# EAGLE board semafor-a-r2-panel (EAGLE 9.4.2)
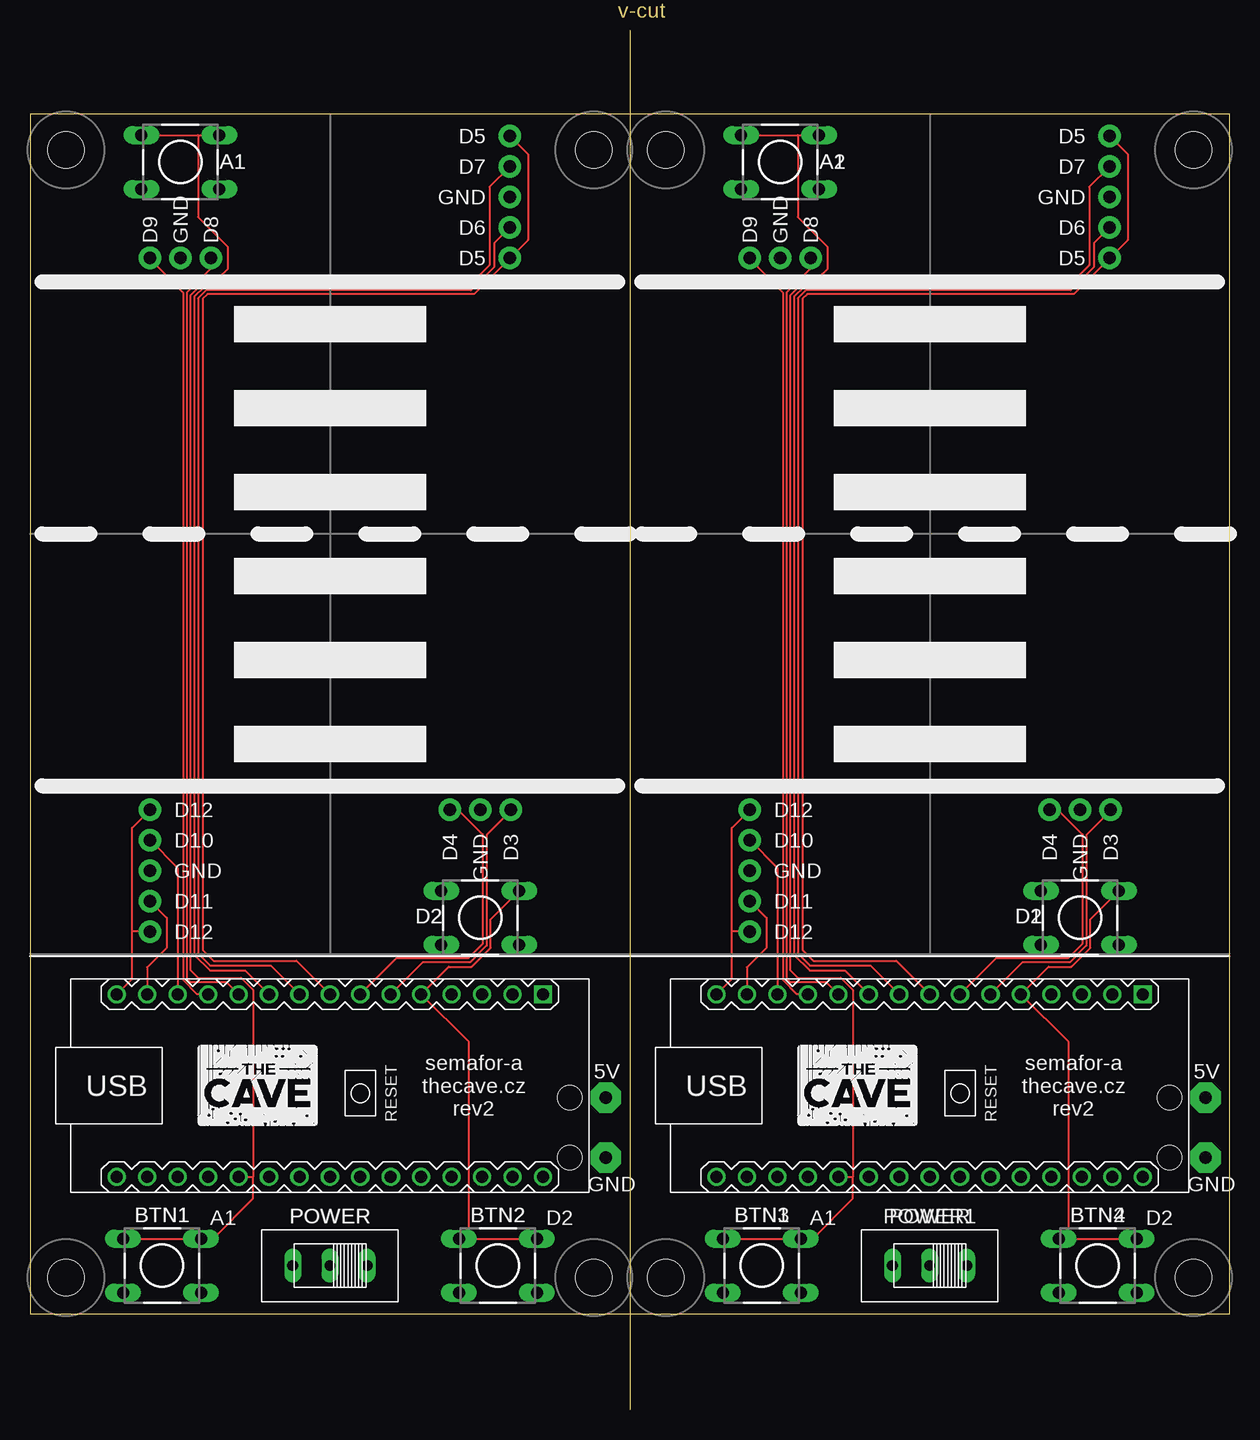
[diagram p0: board, top side]
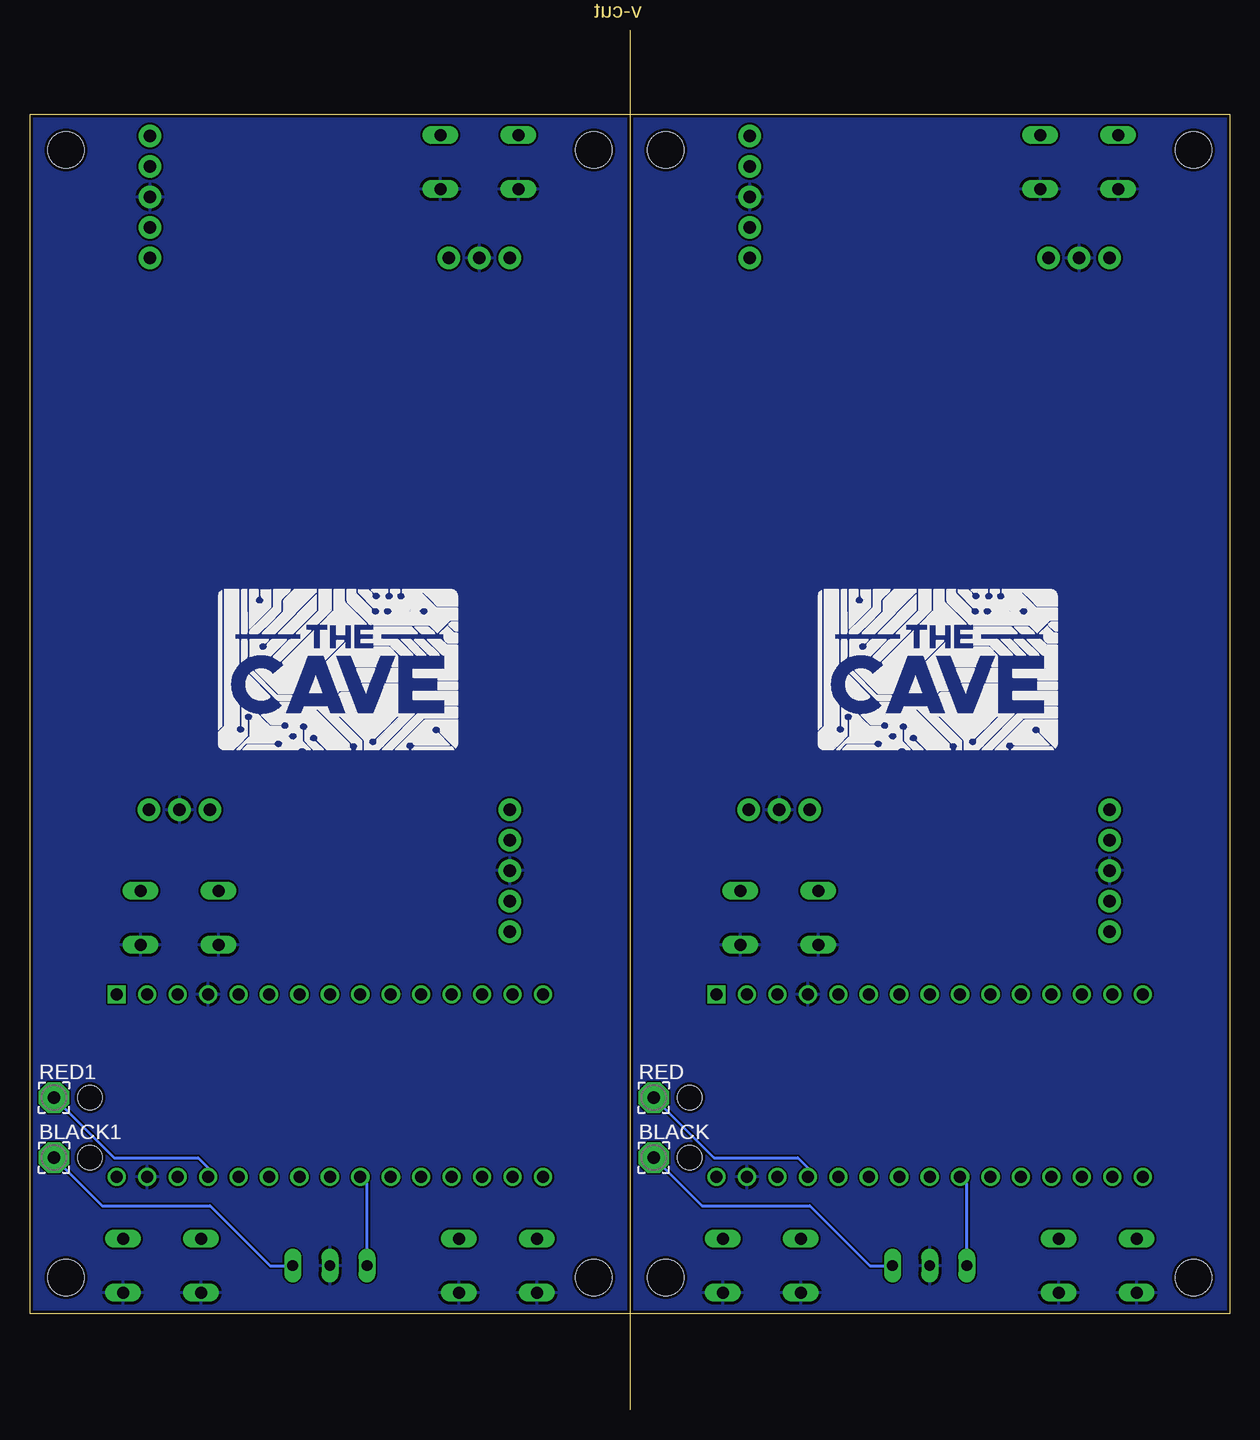
[diagram p1: board, bottom side, seen from below]

Size 100 x 115 mm. Coordinates in mm from the lower left corner, seen from the top.
Outline: 50,115 50,0
Outline: 0,108 0,8 100,8 100,108 0,108
Copper layers (1*16): Top 0.035mm / dielectric 1.5mm / Bottom 0.035mm
Design rules "SeeedStudio_2layer_DRU_no_angle_20140221": minimum track width 6mil, minimum drill 12mil, track to track 6mil, track to pad 6mil, pad to pad 6mil, via to via 6mil, smd to smd 0mil, copper to edge 10mil, drill to drill 10mil, minimum pad ring 10mil, minimum via ring 6mil, stop-mask expansion 2mil, vias tented up to drill 100mil, thermal gap 10mil
Holes 3 mm at 3,11 47,11 47,105 3,105 53,11 97,11 97,105 53,105
Holes 2 mm at 45,26 45,21 95,26 95,21

## Footprints (pad centres in the part's own frame; a part is rotated, then mirrored left to right if it is on the bottom)
DTS-6 = drill 1 long: 1 -3.25,2.25; 2 3.25,2.25; 3 -3.25,-2.25; 4 3.25,-2.25
2,54/1,0 = drill 1.016 pad 2.54 octagon: 1 0,0
1X03_NO_SILK = drill 1.016 pad 1.88: 1 0,0; 2 2.54,0; 3 5.08,0
1X05_NO_SILK = drill 1.016 pad 1.88: 1 0,0; 2 2.54,0; 3 5.08,0; 4 7.62,0; 5 10.16,0
ARDUINO-NANO-3.0 = drill 1 square: J1.1 17.78,7.62 | drill 1: J1.2 15.24,7.62; J1.3 12.7,7.62; J1.4 10.16,7.62; J1.5 7.62,7.62; J1.6 5.08,7.62; J1.7 2.54,7.62; J1.8 0,7.62; J1.9 -2.54,7.62; J1.10 -5.08,7.62; J1.11 -7.62,7.62; J1.12 -10.16,7.62; J1.13 -12.7,7.62; J1.14 -15.24,7.62; J1.15 -17.78,7.62; J2.1 17.78,-7.62; J2.2 15.24,-7.62; J2.3 12.7,-7.62; J2.4 10.16,-7.62; J2.5 7.62,-7.62; J2.6 5.08,-7.62; J2.7 2.54,-7.62; J2.8 0,-7.62; J2.9 -2.54,-7.62; J2.10 -5.08,-7.62; J2.11 -7.62,-7.62; J2.12 -10.16,-7.62; J2.13 -12.7,-7.62; J2.14 -15.24,-7.62; J2.15 -17.78,-7.62
B143 = drill 0.9 long: S1 -3.1,0; S2 0,0; S3 3.1,0

## Placement (x,y rotation side)
A1  DTS-6  [DTS-6]  12.54,104 0 top
A2  DTS-6  [DTS-6]  62.54,104 0 top
BLACK  [2,54/1,0]  48,21 0 bottom
BLACK1  [2,54/1,0]  98,21 0 bottom
BTN1  DTS-6  [DTS-6]  11,12 0 top
BTN2  DTS-6  [DTS-6]  39,12 0 top
BTN3  DTS-6  [DTS-6]  61,12 0 top
BTN4  DTS-6  [DTS-6]  89,12 0 top
D1  DTS-6  [DTS-6]  87.54,41 0 top
D2  DTS-6  [DTS-6]  37.54,41 0 top
J1  [1X03_NO_SILK]  10,96 0 top
J2  [1X03_NO_SILK]  35,50 0 top
J3  [1X05_NO_SILK]  40,96 90 top
J4  [1X05_NO_SILK]  10,50 270 top
J5  [1X03_NO_SILK]  60,96 0 top
J6  [1X03_NO_SILK]  85,50 0 top
J7  [1X05_NO_SILK]  90,96 90 top
J8  [1X05_NO_SILK]  60,50 270 top
M1  ARDUINO-NANO-3.0#NOHOLE  [ARDUINO-NANO-3.0]  25,27 0 top
M2  ARDUINO-NANO-3.0#NOHOLE  [ARDUINO-NANO-3.0]  75,27 0 top
POWER  B143  [B143]  25,12 180 top
POWER1  B143  [B143]  75,12 180 top
RED  [2,54/1,0]  48,26 0 bottom
RED1  [2,54/1,0]  98,26 0 bottom
U$1  THECAVE_LOGO_NEW_TOP_SMALL  [NEW_LOGO_SMALL_TOP]  13.98,23.67 0 top
U$2  THECAVE_LOGO_NEW_BOTTOM  [NEW_LOGO_BOTTOM]  14,55 0 top
U$3  THECAVE_LOGO_NEW_TOP_SMALL  [NEW_LOGO_SMALL_TOP]  63.98,23.67 0 top
U$4  THECAVE_LOGO_NEW_BOTTOM  [NEW_LOGO_BOTTOM]  64,55 0 top

## Library data of the parts
A1 A2 BTN1-BTN4 D1 D2 = switch-tact
BLACK BLACK1 RED RED1 = wirepad
J1-J8 = SparkFun-Connectors
M1 M2 POWER POWER1 U$1-U$4 = thecave

## Nets
3V1: M2.J2.14
3V3: M1.J2.14
BTN1: A1.1 A1.2 BTN1.1 BTN1.2 M1.J2.11
BTN2: BTN2.1 BTN2.2 D2.2 M1.J1.5
BTN3: A2.1 A2.2 BTN3.1 BTN3.2 M2.J2.11
BTN4: BTN4.1 BTN4.2 D1.2 M2.J1.5
GND: A1.3 A1.4 BTN1.3 BTN1.4 BTN2.3 BTN2.4 D2.3 D2.4 J1.2 J2.2 J3.3 J4.3 M1.J1.4 M1.J2.2 POWER.S2
GND1: A2.3 A2.4 BTN3.3 BTN3.4 BTN4.3 BTN4.4 D1.3 D1.4 J5.2 J6.2 J7.3 J8.3 M2.J1.4 M2.J2.2 POWER1.S2
N$1: M1.J2.9 POWER.S3
N$2: BLACK.1 POWER.S1
N$3: M2.J2.9 POWER1.S3
N$4: BLACK1.1 POWER1.S1
P1-G: J3.4 M1.J1.10
P1-G1: J7.4 M2.J1.10
P1-R: J3.2 M1.J1.9
P1-R1: J7.2 M2.J1.9
P1-Y: J3.1 J3.5 M1.J1.8
P1-Y1: J7.1 J7.5 M2.J1.8
P2-G: J4.4 M1.J1.14
P2-G1: J8.4 M2.J1.14
P2-R: J4.2 M1.J1.13
P2-R1: J8.2 M2.J1.13
P2-Y: J4.1 J4.5 M1.J1.15
P2-Y1: J8.1 J8.5 M2.J1.15
P3-G: J2.3 M1.J1.6
P3-G1: J6.3 M2.J1.6
P3-R: J2.1 M1.J1.7
P3-R1: J6.1 M2.J1.7
P4-G: J1.3 M1.J1.11
P4-G1: J5.3 M2.J1.11
P4-R: J1.1 M1.J1.12
P4-R1: J5.1 M2.J1.12
VCC: M1.J2.4 RED.1
VCC1: M2.J2.4 RED1.1
VIN: M1.J2.1
VIN1: M2.J2.1

## Tracks (layer width: path | path; a pad name or v marks a point on that pad's centre or on a via)
BTN1
  Top 0.152: BTN1.1 BTN1.2 15.25,14.25 18.6,17.6 18.6,19.38 | A1.1 14,106.25 | 14,106.25 A1.2 | 18.6,19.38 18.6,35 17.6,36 14,36 13.38,36.61 13.38,92.89 14.8,94.3 15.7,94.3 16.5,95.1 16.5,96.9 14,99.4 14,106.25 | M1.J2.11 18.6,19.38
BTN2
  Top 0.152: BTN2.2 BTN2.1 36.6,15.1 36.6,30.64 M1.J1.5 34.9,36.9 36.8,36.9 38.4,38.5 38.4,40.86 D2.2
BTN3
  Top 0.152: BTN3.1 BTN3.2 65.25,14.25 68.6,17.6 68.6,19.38 | A2.1 64,106.25 | 64,106.25 A2.2 | 68.6,19.38 68.6,35 67.6,36 64,36 63.38,36.61 63.38,92.89 64.8,94.3 65.7,94.3 66.5,95.1 66.5,96.9 64,99.4 64,106.25 | M2.J2.11 68.6,19.38
BTN4
  Top 0.152: BTN4.2 BTN4.1 86.6,15.1 86.6,30.64 M2.J1.5 84.9,36.9 86.8,36.9 88.4,38.5 88.4,40.86 D1.2
GND
  pour Bottom: 0,108 50,108 50,8 0,8
GND1
  pour Bottom: 50,108 100,108 100,8 50,8
N$1
  Bottom 0.254: POWER.S3 21.9,18.82 M1.J2.9
N$2
  Bottom 0.254: BLACK.1 44,17 35,17 30,12 POWER.S1
N$3
  Bottom 0.254: POWER1.S3 71.9,18.82 M2.J2.9
N$4
  Bottom 0.254: BLACK1.1 94,17 85,17 80,12 POWER1.S1
P1-G
  Top 0.152: J3.4 38.3,101.92 38.3,95.4 36.51,93.61 14.55,93.61 13.7,92.76 13.7,37.91 15,36.6 17.94,36.6 M1.J1.10
P1-G1
  Top 0.152: J7.4 88.3,101.92 88.3,95.4 86.51,93.61 64.55,93.61 63.7,92.76 63.7,37.91 65,36.6 67.94,36.6 M2.J1.10
P1-R
  Top 0.152: J3.2 38.7,97.24 38.7,95.24 36.77,93.31 14.67,93.31 14,92.63 14,38.03 15.02,37.02 20.06,37.02 M1.J1.9
P1-R1
  Top 0.152: J7.2 88.7,97.24 88.7,95.24 86.77,93.31 64.67,93.31 64,92.63 64,38.03 65.02,37.02 70.06,37.02 M2.J1.9
P1-Y
  Top 0.152: J3.5 41.5,104.66 41.5,97.5 J3.1 37,93 14.8,93 14.4,92.6 14.4,38.3 15.3,37.4 22.22,37.4 M1.J1.8
P1-Y1
  Top 0.152: J7.5 91.5,104.66 91.5,97.5 J7.1 87,93 64.8,93 64.4,92.6 64.4,38.3 65.3,37.4 72.22,37.4 M2.J1.8
P2-G
  Top 0.152: J4.4 11.4,40.98 11.4,38.5 9.76,36.86 M1.J1.14
P2-G1
  Top 0.152: J8.4 61.4,40.98 61.4,38.5 59.76,36.86 M2.J1.14
P2-R
  Top 0.152: J4.2 12.3,45.16 M1.J1.13
P2-R1
  Top 0.152: J8.2 62.3,45.16 M2.J1.13
P2-Y
  Top 0.152: M1.J1.15 8.5,35.9 8.5,39.8 | 8.5,39.8 8.5,48.5 J4.1 | J4.5 8.54,39.84 8.5,39.8
P2-Y1
  Top 0.152: M2.J1.15 58.5,35.9 58.5,39.8 | 58.5,39.8 58.5,48.5 J8.1 | J8.5 58.54,39.84 58.5,39.8
P3-G
  Top 0.152: J2.3 40.08,49.9 38.08,47.9 38.08,38.68 36.68,37.28 32.74,37.28 M1.J1.6
P3-G1
  Top 0.152: J6.3 90.08,49.9 88.08,47.9 88.08,38.68 86.68,37.28 82.74,37.28 M2.J1.6
P3-R
  Top 0.152: J2.1 35.68,50 37.74,47.94 37.74,38.82 36.54,37.62 30.54,37.62 M1.J1.7
P3-R1
  Top 0.152: J6.1 85.68,50 87.74,47.94 87.74,38.82 86.54,37.62 80.54,37.62 M2.J1.7
P4-G
  Top 0.152: M1.J1.11 16.38,35.62 13.38,35.62 13.08,35.92 13.08,93.1 15.08,95.1 J1.3
P4-G1
  Top 0.152: M2.J1.11 66.38,35.62 63.38,35.62 63.08,35.92 63.08,93.1 65.08,95.1 J5.3
P4-R
  Top 0.152: J1.1 10,95.88 12.78,93.1 12.78,35.79 13.95,34.62 M1.J1.12
P4-R1
  Top 0.152: J5.1 60,95.88 62.77,93.1 62.77,35.79 63.95,34.62 M2.J1.12
VCC
  Bottom 0.254: RED.1 43,21 36,21 35.16,20.16 M1.J2.4
VCC1
  Bottom 0.254: RED1.1 93,21 86,21 85.16,20.16 M2.J2.4

## Text on the board
Dimension: v-cut
tPlace: D5 | D5 | D7 | D7 | GND | GND | D6 | D6 | D9 | GND | D8 | D9 | GND | D8 | D5 | D5 | D12 | D12 | D4 | GND | D3 | D4 | GND | D3 | D10 | D10 | GND | GND | D11 | D11 | D12 | D12 | 5V | 5V | semafor-a / thecave.cz / rev2 | semafor-a / thecave.cz / rev2 | GND | GND | A1 | D2 | A1 | D2
_tNames: A1 | A1 | D2 | D2 | BTN1 | POWER | BTN2 | BTN1 | POWER | BTN2
_bNames: RED | RED | BLACK | BLACK